# Altium PCB Pulser Driver.PcbDoc (part 3 of 3)
Units mil, origin at the board's own origin, x right, y up, seen from the top; angles counter-clockwise.
Board outline 1200 x 10020 mil, 6 copper layers (TopLayer, Ground, MidLayer1, MidLayer2, Power, BottomLayer); 260 components, 152 nets, 836 pads, 245 vias.
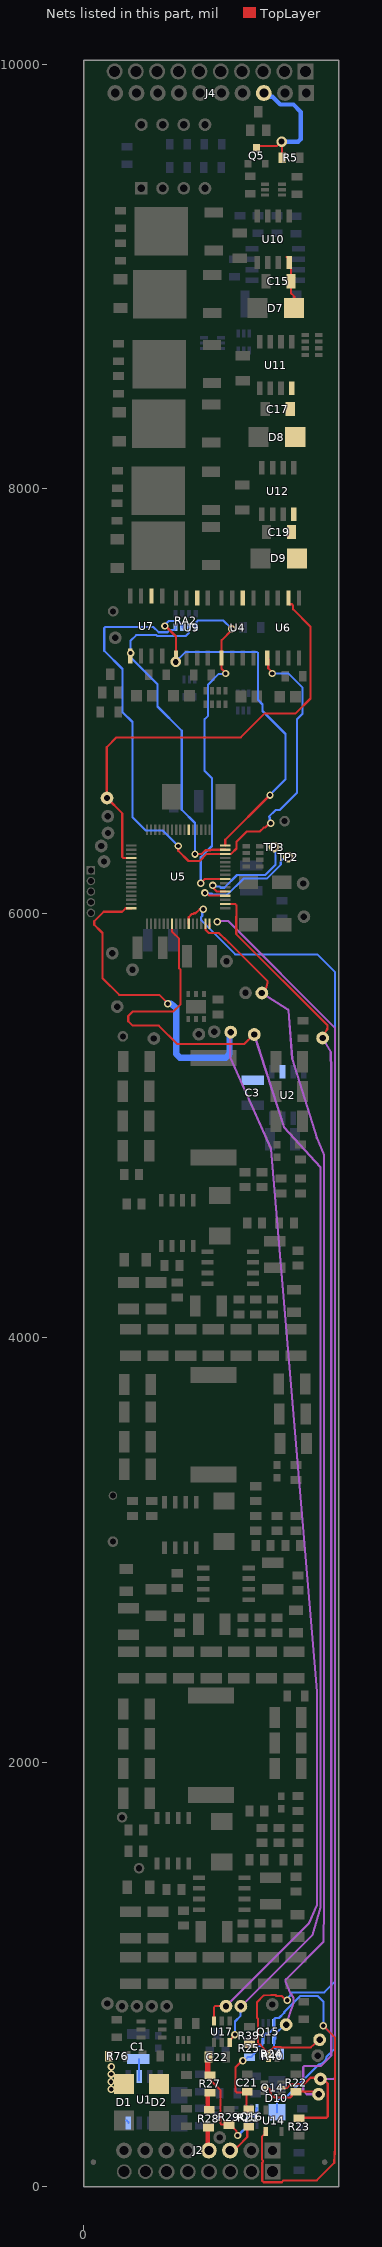
[diagram p7: the nets of this part, all layers, seen from the top]

## Via types
v1: diameter 35, hole 20, TopLayer to BottomLayer, 210 vias
v2: diameter 50, hole 28, TopLayer to BottomLayer, 35 vias

## Nets (pads, with @x,y where several pads share a name; then routed paths per layer and width w, separated by ;. In a path a pad name is that pad's centre, name@x,y a point inside that pad or via, vN(x,y) a via of type N, cw(c..) or ccw(c..) an arc to the next point about the centre after c; other vN are vias at no path point) (continued)
PP: C22.1 Q16.3 Q16.6 R27.1 R29.1 | length 624
  TopLayer w10: C22.1@583.33,603.33 587.32,607.32 C22.1@587.32,610 ; R27.1@592,523 598.86,516.14 598.86,498.14 624.96,472.04 625.56,472.04 632.59,465.01 632.59,464.41 643,454 643,297.86 648.86,292 R29.1@681,292 ; R29.1@685,291 691.75,291 706,276.75 706,275 719.75,261.25 719.75,245.34 v1(724.53,240.56)
  TopLayer w25: R27.1@583.33,537.45 C22.1@583.33,603.33
  BottomLayer w10: v1(724.53,240.56) 732.43,240.56 738.28,246.42 738.28,252.34 764.41,278.47 Q16.3@764.41,289.29 764.41,322.41 772.29,330.29 806.86,330.29 812.72,336.15 812.72,367.13 Q16.6@815.59,370
PP2: R27.2 R28.1 | length 80
  TopLayer w20: R28.1@583.33,370 R27.2@583.33,450
PULSE: J2.4 R28.2 | length 120.1
  TopLayer w10: J2.4@583.33,176.67 J2.4@590,170
  TopLayer w20: J2.4@583.33,176.67 R28.2@583.33,287.32
Q: J2.3 R21.2 | length 160.3
  TopLayer w10: J2.3@690,170 706.59,170 724.85,188.26 724.98,188.26 770,233.28 R21.2@770,287.32
Q-EN#: pad.44 Q14.5 R22.2 U5.34 | length 6319.9
  TopLayer w10: U5.34@666.38,6043.58 666.69,6043.27 713.14,6043.27 719,6037.41 719,5984.21 718.24,5983.45 718.24,5901.76 1147.95,5472.05 1147.95,5467.53 1146.87,5453.04 1143.98,5450.15 1143.7,5449.91 pad.44@1125,5412 ; Q14.5@850,465.59 852.87,462.72 870.83,462.72 880.7,452.84 880.7,435.3 895.87,420.13 973.55,420.13 979.41,425.98 979.41,434.61 992.13,447.32 R22.2@1000,447.32 1084.42,447.32 pad.44@1106,435
  MidLayer1 w10: pad.44@1106,435 1050,435 1034,451 1034,563.14 1039.86,569 1118,569 1166,617 1166,5254.32 1166,5254.6 1163.47,5346.84 pad.44@1125,5412
Q-RX: pad.40 Q15.4 R24.1 U5.31 | length 5702.3
  TopLayer w10: U5.31@572.8,5950 573.11,5949.69 573.11,5922.4 585.79,5909.72 588.71,5906.8 631.87,5906.8 635.71,5906.8 682.17,5862.83 682.27,5862.73 866.16,5678.84 866.16,5673.47 865.86,5672.27 856.69,5635.73 854.73,5633.77 853.86,5632.9 852.8,5632.27 pad.40@839,5624 ; pad.40@951,759 pad.40@952,758
  MidLayer1 w10: pad.40@839,5624 961.44,5546.75 961.72,5546.5 964.61,5543.61 982,5312.65 982.34,5311.57 1097.56,4941.73 1128.61,4867.57 1132,4863.12 1132,1309.97 1132,1309.78 1129.07,1161.31 1129.07,1153.07 952.99,976.99 950.87,974.87 950.87,967.34 950.87,966.59 971.31,915.22 987.5,890.22 987.5,865.78 pad.40@953,763
  BottomLayer w10: 895.59,671.16 Q15.4@895.59,690 ; Q15.4@895.59,695.59 901.93,695.59 Q15.4@903.23,696.89 ; 903.17,650 896,657.17 896,695.59 902.14,701.73 902.14,719.14 946,763 pad.40@953,763
Q-TX: pad.39 Q14.2 R23.1 U5.32 | length 6336
  TopLayer w10: U5.32@592.48,5939 U5.32@592.48,5950 ; Q14.2@930.71,465.59 957.99,465.59 975.68,483.28 1038.28,483.28 1068,513 1109,513 pad.39@1115,507 1127.64,507 1149,485.64 1149,329.86 1143.14,324 R23.1@1014,324
  MidLayer1 w10: v1(629,5960) 632.38,5963.38 679.62,5963.38 1183,5460 1183,511.27 1178.53,506.8 pad.39@1115,507
QP: C21.2 D10.2 Q15.3 Q15.6 R21.1 R25.1 U14.4 | length 2840.3
  TopLayer w10: v1(749.41,592.5) 745.5,592.5 714.5,561.5 714.5,448.83 720.36,442.97 765.65,442.97 C21.2@770,447.32 ; C21.2@765.7,446.06 765.7,374.3 R21.1@770,370 ; U14.4@852.6,260.59 852.6,249 840,236.4 840,212.97 839.5,212.47 839.5,127.53 843.39,123.64 843.39,115.36 840.5,112.47 840.5,27.53 847.53,20.5 932.47,20.5 940.97,29 1097.64,29 1180.07,111.43 1182.99,186.59 1183,186.88 1183,187.07 1183,703 v1(1128,758)
  BottomLayer w10: v1(749.41,592.5) 754.63,592.5 772.13,610 787.87,610 800.59,622.72 800.59,624.59 813.28,637.28 813.28,655.56 820.31,662.59 835.68,662.59 841.54,668.45 841.54,687.13 Q15.6@844.41,690 844.41,709 856.41,721 870,721 895.59,746.59 Q15.3@895.59,770.71 895.59,787.59 902,794 919.4,794 944,818.6 944,822.28 1019.72,898 1102,898 1130,870 1130,760 v1(1128,758) 1182,704 1182,650 1143.66,611.66 cw(c1102,617) 1107.34,575.34 950.38,418.38 928.38,418.38 910,400 D10.2@910,350
REF-3V0: C3.2 pad.37 U2.6 U5.16 U17.6 | length 6414.1
  TopLayer w10: U5.16@223.31,6023.9 197,6023.9 180.1,6007 93,6007 49,5963 49,5945.78 78.41,5916.38 78.59,5916.38 88,5906.97 88,5693.74 166.52,5615.23 355.77,5615.23 395.18,5575.82 v1(395.18,5573.48) ; U17.6@612.6,779.41 612.6,844.14 618.46,850 pad.37@670,850
  MidLayer1 w10: pad.37@670,850 1061.07,1241.07 1097.13,1322.02 1098,1323.96 1098,2331.37 882.13,4888.97 881.98,4890.67 690,5318 690,5438 pad.37@692,5440
  BottomLayer w30: v1(395.18,5573.48) 396.55,5573.62 398.16,5573.8 410.35,5573.8 425.07,5561.96 435,5552.03 435,5336.57 443.79,5327.79 452.57,5319 668.69,5319 686.26,5336.57 686.26,5434.26 pad.37@692,5440
RS: C1.2 D1.1 D2.1 R76.1 U1.2 U1.8 | length 130.9
  TopLayer w10: v1(129,459) 137,459 D1.1@143,465
  BottomLayer w10: U1.8@202,311.14 210,303.14 U1.8@210,300 ; U1.2@260,501 C1.2@260,600.94
  other v1: 128,494 129,530 130,565
RTD: pad.41 R39.1 R40.1 U5.27 | length 6691.5
  TopLayer w10: U5.27@494.06,5950 494.06,5982.06 508.58,5996.58 515.78,5996.58 519.08,5999.88 526.15,5999.88 545.77,6019.5 v1(562.5,6019.5) ; R39.1@780,670 819,670 819,669 ; R40.1@869.69,614.65 R40.1@869.69,630.39 ; v1(958,878) 951.61,878 931.82,897.78 907.61,897.78 902.87,902.53 881.48,902.53 881.08,902.52 848.21,901.21 815.94,868.94 815.94,806.03 816,805.97 816,795.58 821,790.58 821,671 819,669 ; pad.41@1111,692 1070,657 1070,655 930,655 928,657 895.07,657 885.2,647.13 885.2,645.91 R40.1@869.69,630.39 ; 819,669 831.08,669 R40.1@869.69,630.39
  BottomLayer w10: v1(562.5,6019.5) 557.72,6014.72 557.72,5987.95 552.5,5982.74 552.5,5967.46 713.57,5806.39 1100.61,5806.39 1183,5724 1183,965 1133,915 981,915 973.93,907.93 973.93,900.69 958,884.76 v1(958,878)
RTD-EN: pad.32 U5.23 U17.3 | length 6349
  TopLayer w10: U5.23@415.32,5950 415.32,5913 449,5879.32 449,5741.19 456,5734.19 456,5572 421,5537 230.39,5537 209.22,5515.84 209.22,5491.4 230.09,5470.53 353.47,5470.53 440,5384 756.14,5384 776.14,5404 pad.32@803,5429 ; U17.3@687.4,680 697.4,701.4 v1(712,716)
  MidLayer1 w10: pad.32@740,850 742,850 1078.07,1186.07 1114.62,1315.58 1115,1318.3 1115,4798.42 1115,4802.28 943.43,4991.94 942.77,4993.99 pad.32@803,5429
  BottomLayer w10: v1(712,716) 712,778.04 738.96,805 738.96,848.96 pad.32@740,850
SCL: TP3.1 U5.37 | length 507.8
  TopLayer w10: v1(607.57,6131.43) 612.36,6126.64 612.36,6116.97 626.69,6102.64 U5.37@666.38,6102.64
  BottomLayer w10: v1(607.57,6131.43) 612.36,6126.64 638.93,6126.64 645.07,6120.5 661.77,6120.5 721.31,6180.04 855.04,6180.04 903,6228 903,6305 TP3.1@896,6312
SCLK2: pad.50@109,6543 U4.6 U5.4 U6.6 U7.6 U9.6 | length 2165.8
  TopLayer w10: pad.50@108,6545.86 108,6783 154,6829 739.72,6829 852.72,6942 998.18,6942 1068,7011.82 1068,7350 986,7432 986,7450.14 980.14,7456 969,7456 U6.6@967.65,7457.35 ; pad.50@109,6543 181,6471 181,6265.98 186.86,6260.12 U5.4@223.31,6260.12 ; U6.6@964,7457.35 U6.6@964,7486
SDA: TP2.1 U5.36 | length 581.2
  TopLayer w10: v1(570.29,6096) 577.06,6096 590.11,6082.95 U5.36@666.38,6082.95
  BottomLayer w10: v1(570.29,6096) 574.29,6092 602.79,6092 607.79,6087 676.35,6087 752.4,6163.04 862.09,6163.04 928,6228.96 928,6246 938.35,6256.35 955.35,6256.35 TP2.1@963,6264
SFLASH-CS1#: RA2.4 U5.47 U7.1 | length 1609.1
  TopLayer w10: U7.1@219,7219.5 U7.1@222.75,7223.25 ; v1(220,7226) U7.1@220,7227 ; v1(523.61,6278.71) 525.05,6280.15 556.11,6280.15 572.76,6296.8 597.26,6296.8 599.95,6299.49 U5.47@666.38,6299.49
  BottomLayer w10: RA2.4@495.5,7348 495.5,7321.5 481,7307 345.74,7307 342.24,7310.5 246.53,7310.5 220,7283.97 v1(220,7226) 222.98,7223.02 222.98,7203.02 347,7079 347,6974 461,6860 461,6488 523.61,6425.39 v1(523.61,6278.71)
SFLASH-CS2#: RA2.6 U5.48 U9.1 | length 1781.4
  TopLayer w10: v1(382,7353.5) 384.5,7353.5 434,7304 U9.1@434,7203 ; v2(433,7185) U9.1@436.81,7181.19 ; U5.48@666.38,6319.17 666.38,6346.38 v1(877,6557)
  BottomLayer w10: v1(382,7353.5) 382,7358.24 401.48,7377.72 447.33,7377.72 454.35,7370.69 454.35,7365.53 464.01,7355.87 RA2.6@464.01,7348 ; v2(433,7185) 480,7232 815.14,7232 821,7226.14 821,7005 842,6984 842,6953 950,6845 950,6631.79 877,6558.79 v1(877,6557)
SFLASH-CS3#: RA2.2 U4.1 U5.40 | length 1658.2
  TopLayer w10: v1(550.99,6141.23) 550.99,6142.22 570.2,6161.43 586.67,6161.43 587.26,6162.02 611.7,6162.02 612.03,6161.69 U5.40@666.38,6161.69 ; v1(668,7130) 668,7133.39 648.39,7153 648.39,7202.39 U4.1@649,7203 649,7287 697,7335 v1(697,7340)
  BottomLayer w10: RA2.2@527,7348 530.63,7351.63 530.63,7373.14 536.49,7379 658,7379 v1(697,7340) ; v1(550.99,6141.23) 550.78,6170.44 550.78,6178.73 550.78,6264.28 603.56,6317.06 603.56,6636.19 569.37,6670.38 569.37,6914.59 585.5,6930.72 585.5,7078.22 635.5,7128.22 666.22,7128.22 v1(668,7130)
SFLASH-CS4#: RA2.8 U5.46 U6.1 | length 3125.8
  TopLayer w10: v1(445,6317) 445,6294 493,6246 546,6246 579.8,6279.8 U5.46@666.38,6279.8 666.69,6280.12 693.98,6280.12 719.29,6305.43 719.29,6337.35 767.16,6385.22 829.22,6385.22 847.73,6403.73 853.65,6403.73 873.92,6424 v1(880.5,6424) ; U6.1@864,7203 869,7198 869,7153.76 887.86,7134.91 v1(887.86,7129.86)
  BottomLayer w10: RA2.8@432.51,7348 432.51,7340.13 427.67,7335.28 405.5,7335.28 394.22,7324 352.78,7324 327.78,7349 101.86,7349 96,7343.14 96,7237 182,7151 182,6948 229,6901 229,6453 291.72,6390.28 371.72,6390.28 v1(445,6317) ; v1(880.5,6424) 875.72,6428.78 875.72,6450.85 871.78,6454.78 903.14,6486.14 922.14,6486.14 1004.5,6568.5 1004.5,6914.92 1031,6941.42 1031,7063.04 965.04,7129 888.72,7129 v1(887.86,7129.86)
SFLASH-CS5#: U5.54
VB1: C15.2 D7.2 U10.8 | length 256
  TopLayer w10: U10.8@955,9093 976.11,9071.89 C15.2@976.11,8978 976.11,8922.12 991.23,8907 D7.2@991.23,8852
VB2: C17.2 D8.2 U11.8
VB3: C19.2 D9.2 U12.8
VHALL: J4.3 Q5.3 R5.1 | length 640.8
  TopLayer w10: Q5.3@814,9607.2 821.8,9615 909,9615 930,9636 v2(932,9636) 932,9612.5 934,9610.5 R5.1@934,9560
  BottomLayer w20: J4.3@848,9865 862.88,9865 880.61,9847.27 888.66,9847.27 925.43,9810.5 987.5,9810.5 1022,9776 1022,9647.72 1010.28,9636 v2(932,9636)
pads on no net: F1. J2.6 J3.1 J3.2 J3.3 J3.4 J3.5 J3.6 J3.7 J3.8 J5.1 J5.2 J5.3 J5.4 J5.5 J5.6 J5.7 J5.8 J5.9 J5.10 Q7.3 Q13.6 Q18.3 Q19.3 R20. R35. RA3.1 RA3.2 RA5.1 RA5.2 U1.5 U2.1 U2.3 U2.5 U2.7 U2.8 U5.3 U5.33 U5.35 U8.1 U8.4 U8.5 U8.6 U8.7 U16.2 U16.8 X1.1
copper on no net:
  other v1: 184,8755 122.02,8758.09 186,8796 128,8808 120.5,8871

## Polygon pours and split planes (outlines as drawn)
DC- on MidLayer2 "DC-_L04_P000" (solid, pour order 0): 1190,7577 229,7577 229,9358 230,9359 885,9359 886,9358 916,9388 916,9906 982,9906 984,9908 1180,9906 1180,9366 1200,9366
3V3GND on MidLayer2 "3V3GND_L04_P004" (solid, pour order 4): 4,5370 6,5372 1203,5372 1203,3891 7,3891 7,5367
12VGND on MidLayer2 "12VGND_L04_P002" (solid, pour order 2): 13,2347 1196,2347 1196,910 1099,910 13,910
5VGND on MidLayer2 "5VGND_L04_P003" (solid, pour order 3): 1201,3860 1201,2363 4,2363 4,3860
GND on Ground (split plane): 1179.9,20.1 20.1,20.1 20.1,9999.9 1179.9,9999.9
3V3_VDD on Power (split plane): 1179.9,20.1 20.1,20.1 20.1,9999.9 1179.9,9999.9

## Keep-outs
KeepOutLayer:
  the board outline again, w10

## Other copper
TopLayer:
  rectangle net 3V3_VDD: 510,744 591,859
  rectangle net 5V: 802,9730 908,9805
  rectangle net 12V: 691,7624 883,7717
  rectangle net 3V3_VDD: 164,4015 398,4101
  rectangle net 3V3_VDD: 41,2439 260,2550
  rectangle net 3V3: 518,683 623,716
  rectangle net 3V3: 325,730 341,787
  rectangle net 3V3: 326,730 349,750
  rectangle net 3V3: 250,768 336,787
  rectangle net 3V3: 219,760 280,879
  rectangle net 3V3_VDD: 656,1235 691,1315
  rectangle net 3V3_VDD: 165,1050 1051,1135
  rectangle net 3V3: 177,4604 221,4722
  rectangle net GND: 485,5660 619,5706
  rectangle net 12V: 180,1475 229,1606
  rectangle net RTD-EN: 677,660 724,729
  rectangle net 5V: 937,63 970,282
  rectangle net REF-3V0: 602,758 623,880
  rectangle net REF-3V0: 602,820 700,880
  rectangle net 3V3GND: 92,3893 153,5454
  rectangle net 5VGND: 130,3258 219,3832
  rectangle net 5V: 143,3141 256,3182
  rectangle net 5VGND: 85,3234 172,3276
  rectangle net 5VGND: 84,3088 132,3273
  rectangle net GND: 486,5693 572,5745
  rectangle net GND: 468,5606 501,5850
  rectangle net GND: 347,5742 393,5892
  rectangle net GND: 130,733 181,805
  rectangle net GND: 61,730 292,747
  rectangle net 3V3: 108,7395 245,7450
  rectangle net CANL: 253,133 327,356
  rectangle net CANH: 152,132 225,361
  rectangle net LTC: 897,579 1105,641
  rectangle net RTD: 856,587 882,687
  rectangle net RTD: 755,651 883,687
  rectangle net NetR39_2: 681,760 804,801
  rectangle net BAT-M: 356,590 446,643
  rectangle net NetQ19_6: 430,671 447,795
  rectangle net 5VGND: 159,2370 1100,2420
  rectangle net 3V3GND: 1007,5317 1060,5428
  rectangle net 5VGND: 940,2287 975,2418
  rectangle net GND: 1002,667 1061,807
  rectangle net 12VGND: 1006,854 1060,980
  rectangle net GND: 184,589 293,663
  rectangle net RS: 102,442 402,531
  rectangle net RS: 99,437 170,642
  rectangle net GND: 907,6109 1062,6166
  rectangle net VHALL: 907,9535 958,9661
  rectangle net 12V: 713,8441 851,8552
  rectangle net 5VGND: 630,2562 690,3050
  rectangle net GND: 637,583 687,636
  rectangle net NetC61_2: 370,3149 724,3385
  rectangle net NetR59_2: 970,3160 1030,3350
  rectangle net 5VGND: 1050,2370 1100,3840
  rectangle net 3V3_VDD: 500,4020 608,4270
  rectangle net 3V3GND: 1060,3900 1140,4780
  rectangle net 12VOutPSU: 268,1558 296,2303
  rectangle: 105,8741 203,8872
  rectangle net 3V3_VDD: 91,8124 197,8261
  rectangle net 1: 687,9560 736,9824
  rectangle net 1: 709,9739 786,9898
  rectangle net 3: 12,8059 42,9820
  rectangle net 3: 12,9788 285,9820
  rectangle net 3: 207,9790 283,9912
  rectangle net 2: 51,8667 96,9777
  rectangle net 2: 51,9753 485,9780
  rectangle net 2: 408,9764 484,9894
  rectangle net 1: 706,9822 783,9897
  rectangle net 1: 707,9560 753,9898
  rectangle net 1: 123,9551 747,9598
  region net DC-: 852,9358 852,9255 884,9255 884,9358
  rectangle net 1: 121,9292 160,9594
  rectangle net PHASE-1: 147,9141 195,9246
  rectangle net 1: 150,9292 292,9326
  rectangle net PHASE-1: 148,9141 195,9174
  rectangle net NetF1_1: 138,8960 304,9010
  rectangle net 3: 14,8060 477,8105
  rectangle net 3V3_VDD: 77,7566 183,7703
  rectangle net NetF3_1: 124,7741 327,7789
  rectangle net 3V3: 309,7066 336,7424
  rectangle net 3V3: 221,7065 342,7152
  rectangle net 3V3: 224,7000 280,7149
  rectangle net GND: 571,7319 658,7360
  rectangle net GND: 572,7096 619,7359
  rectangle net GND: 364,7090 481,7139
  rectangle net 3V3: 750,5952 803,6098
  rectangle net PGC: 253,5935 303,5970
  rectangle net 3V3: 231,5739 299,5891
  rectangle net Q-TX: 587,5926 633,5975
  rectangle net VHALL: 799,9590 957,9625
  rectangle net 2: 59,8667 481,8722
  rectangle net 3V3: 140,6940 282,7065
  rectangle net GND: 671,342 700,636
  rectangle net 5VGND: 440,2564 688,2591
  rectangle net 3V3_VDD: 31,1041 76,5902
  rectangle net SCLK2: 522,7452 546,7551
  rectangle net SCLK2: 307,7454 331,7550
  rectangle net SCLK2: 737,7452 761,7551
  rectangle net MISO2: 897,7169 933,7293
  rectangle net MISO2: 671,7168 708,7291
  rectangle net MISO2: 468,7168 501,7293
  rectangle net MISO2: 250,7169 284,7290
  rectangle net 3V3: 955,7091 968,7424
  rectangle net GND: 990,7091 1040,7302
  rectangle net 3V3: 740,7166 759,7421
  rectangle net GND: 789,7162 809,7239
  rectangle net 3V3: 512,7097 544,7421
  rectangle net GND: 358,7092 378,7240
  rectangle net 3V3: 309,7092 328,7425
  rectangle net 3V3: 210,7396 277,7527
  rectangle net SCLK2: 951,7450 975,7551
  rectangle net 3V3: 424,7406 494,7523
  rectangle net 3V3: 639,7406 708,7522
  rectangle net 3V3: 854,7406 923,7522
  rectangle net 3V3: 207,7404 968,7424
  rectangle net SCLK2: 308,7542 976,7551
  region net HA: 562,8848 562,8757 649,8757 649,8848
  region net 2: 557,8428 557,8370 688,8370 688,8428
  region net 2: 655,8594 655,8371 688,8371 688,8594
  region net 2: 656,8596 656,8571 886,8571 886,8596
  region net 1: 562,9035 562,8986 688,8986 688,9035
  region net 1: 663,9169 663,8986 689,8986 689,9169
  region net 1: 663,9169 663,9136 882,9136 882,9169
  region net 1: 838,9170 838,8945 881,8945 881,9170
  region net DC-: 572,9325 572,9197 657,9197 657,9325
  region net DC-: 572,9236 572,9184 769,9184 769,9236
  region net LA: 534,9147 534,9099 653,9099 653,9147
  region net LA: 511,9360 511,9100 545,9100 545,9360
  region net LA: 511,9360 511,9336 827,9336 827,9360
  region net LA: 803,9360 803,9257 827,9257 827,9360
  region net 12V: 702,9108 702,8804 829,8804 829,9108
  region net HA: 564,8787 564,8756 921,8756 921,8787
  region net HA: 904,9087 904,8757 931,8757 931,9087
  region net VB1: 955,9093 955,8891 1030,8891 1030,9093
  region net HB: 541,8184 541,8152 939,8152 939,8184
  region net VB2: 952,8504 952,8197 1044,8197 1044,8504
  region net HB: 540,8243 540,8153 703,8153 703,8243
  region net 12V: 713,8505 713,8441 845,8441 845,8505
  region net 2: 866,8596 866,8344 892,8344 892,8596
  region net PHASE-2: 138,8620 138,8511 191,8511 191,8620
  region net LB: 520,8562 520,8474 631,8474 631,8562
  region net DC-: 545,8703 545,8570 632,8570 632,8703
  region net LB: 521,8734 521,8714 841,8714 841,8734
  region net DC-: 547,8649 547,8606 890,8606 890,8649
  region net DC-: 865,8722 865,8620 891,8620 891,8722
  region net LB: 521,8734 521,8497 538,8497 538,8734
  region net HB: 916,8505 916,8151 939,8151 939,8505
  region net 12V: 713,8545 713,8196 784,8196 784,8545
  region net 12V: 715,7719 715,7626 880,7626 880,7719
  region net 12V: 713,7918 713,7626 785,7626 785,7918
  region net VB3: 961,7911 961,7625 1052,7625 1052,7911
  region net 3: 875,7910 875,7764 902,7764 902,7910
  region net DC-: 877,8130 877,8023 901,8023 901,8130
  region net LC: 507,7963 507,7899 645,7899 645,7963
  region net 3: 608,7846 608,7798 686,7798 686,7846
  region net 12V: 713,7910 713,7850 852,7850 852,7910
  region net HC: 556,7666 556,7582 647,7582 647,7666
  region net HC: 557,7616 557,7581 950,7581 950,7616
  region net 3: 665,7983 665,7935 908,7935 908,7983
  region net PHASE-3: 130,8018 130,7920 183,7920 183,8018
  region net HC: 925,7909 925,7581 950,7581 950,7909
  region net 3: 652,7983 652,7798 702,7798 702,7983
  region net 3: 864,7983 864,7765 909,7765 909,7983
  region net DC-: 558,8110 558,7998 644,7998 644,8110
  region net LC: 507,8136 507,7925 540,7925 540,8136
  region net LC: 507,8140 507,8118 852,8118 852,8140
  region net DC-: 557,8042 557,7997 901,7997 901,8042
  region net LC: 824,8137 824,8068 851,8068 851,8137
  rectangle net 3V3GND: 1060,4710 1135,5343
  rectangle net 3V3GND: 1010,4970 1120,5350
  rectangle net NetR49_2: 990,4730 1050,4860
  rectangle net NetC47_2: 900,4730 950,4870
  rectangle net 3V3OutPSU: 880,4890 1040,4930
  rectangle net 3V3GND: 98,4740 215,5455
  rectangle net 3V3OutPSU: 880,4890 928,5360
  rectangle net 3V3OutPSU: 240,4604 340,5360
  rectangle net 3V3OutPSU: 290,5290 930,5360
  rectangle net 3V3GND: 553,4395 691,4521
  rectangle net 3V3GND: 750,4629 870,4670
  rectangle net 3V3GND: 815,4630 865,4730
  rectangle net 3V3GND: 750,4495 790,4669
  rectangle net NetC39_1: 730,4760 870,4810
  rectangle net NetC39_2: 670,4690 790,4730
  rectangle net 3V3FB: 900,4590 1050,4700
  rectangle net NetC39_2: 356,4618 720,4879
  rectangle net 3V3GND: 93,4492 788,4576
  rectangle net 3V3FB: 820,4410 940,4610
  rectangle net NetC38_2: 860,4181 1030,4251
  rectangle net NetC40_2: 770,4330 950,4370
  rectangle net 3V3FB: 769,4394 948,4480
  rectangle net NetC40_2: 850,4306 1036,4371
  rectangle net NetC40_1: 970,4390 1040,4570
  rectangle net 3V3RC: 710,4161 823,4264
  rectangle net 3V3ISNS: 625,4101 675,4321
  rectangle net 3V3ISNS: 430,4300 675,4330
  rectangle net NetQ20_1: 270,4310 400,4460
  rectangle net NetQ20_1: 350,4400 480,4460
  rectangle net 3V3GND: 89,4109 466,4211
  rectangle net 3V3GND: 88,3890 180,3940
  rectangle net 3V3GND: 960,3890 1140,3940
  rectangle net 3V3GND: 960,4090 1120,4140
  rectangle net 12V: 190,1475 285,1525
  rectangle net 5VGND: 84,3235 174,3831
  rectangle net NetC69_2: 890,3170 930,3360
  rectangle net 5VOutPSU: 880,3380 940,3850
  rectangle net 5VGND: 1010,3450 1060,3840
  rectangle net 5VOutPSU: 290,3210 340,3850
  rectangle net 5VOutPSU: 203,3210 346,3250
  rectangle net 5VGND: 294,3088 346,3179
  rectangle net 5VOutPSU: 290,3800 940,3850
  rectangle net NetC61_1: 784,3140 835,3250
  rectangle net NetC61_2: 710,3280 840,3384
  rectangle net 5VOutPSU: 900,3380 1040,3420
  rectangle net 3V3_VDD: 360,4240 610,4270
  rectangle net 3V3_VDD: 167,4233 239,4411
  rectangle net 3V3_VDD: 179,4236 480,4285
  rectangle net 3V3GND: 790,4090 1020,4140
  rectangle net 3V3_VDD: 700,4030 760,4130
  rectangle net 3V3GND: 180,3890 1040,3940
  rectangle net NetC62_2: 840,2790 950,2880
  rectangle net NetC62_2: 750,2860 950,2880
  rectangle net 5vFB: 750,2910 950,2970
  rectangle net 5VGND: 608,3000 840,3130
  rectangle net 5VGND: 630,3010 830,3050
  rectangle net 5vFB: 860,3070 1030,3110
  rectangle net 5vFB: 860,2910 950,3110
  rectangle net NetC62_1: 1000,2860 1040,3030
  rectangle net 5VGND: 970,2560 1030,2650
  rectangle net 5VGND: 160,2580 220,2690
  rectangle net 5VGND: 160,2570 470,2640
  rectangle net 5VGND: 680,2637 1030,2653
  rectangle net 5VISNS: 290,2800 590,2830
  rectangle net NetQ21_1: 170,2890 440,2930
  rectangle net 5VGDRV: 500,2980 540,3040
  rectangle net 5VGDRV: 500,2870 520,3040
  rectangle net 5VGDRV: 500,2850 590,2880
  rectangle net 5VGND: 530,2900 660,2930
  rectangle net 5VRC: 720,2660 810,2770
  rectangle net NetC62_2: 840,2790 1040,2840
  rectangle net NetC60_2: 880,2660 1040,2730
  rectangle net 5VGND: 804,2587 1098,2652
  rectangle net GND: 923,669 1020,719
  rectangle net 3V3_VDD: 720,2500 780,2630
  rectangle net 3V3_VDD: 290,2660 600,2750
  rectangle net 3V3_VDD: 510,2600 600,2780
  rectangle net 3V3_VDD: 240,2700 600,2770
  rectangle net 3V3_VDD: 51,2700 260,2870
  rectangle net NetQ21_1: 430,2870 470,3040
  rectangle net NetQ21_1: 370,2980 490,3040
  rectangle net 5VGND: 87,3088 839,3130
  rectangle net 5V: 220,3000 320,3080
  rectangle net 12VISNS: 440,1350 480,1430
  rectangle net 12VISNS: 300,1280 400,1360
  rectangle net 12VISNS: 300,1340 570,1360
  rectangle net 12VGND: 1060,1640 1110,1940
  rectangle net 12VGND: 1000,1920 1110,2260
  rectangle net NetC83_1: 820,1670 870,1790
  rectangle net 12VGND: 750,1600 860,1640
  rectangle net 12VGND: 530,1510 800,1660
  rectangle net NetC84_1: 990,1440 1030,1570
  rectangle net 12VGND: 100,928 150,2300
  rectangle net 12VGND: 170,1150 270,1230
  rectangle net 12VGND: 1060,930 1110,1730
  rectangle net 12VGND: 102,930 190,981
  rectangle net 12VGND: 99,1210 621,1260
  rectangle net 12VGND: 580,1150 620,1470
  rectangle net NetQ22_1: 340,1390 410,1550
  rectangle net NetQ22_1: 340,1480 460,1550
  rectangle net NetQ22_1: 290,1380 410,1450
  rectangle net 12VGND: 530,1450 700,1570
  rectangle net 12VOutPSU: 870,1820 930,2350
  rectangle net 12VOutPSU: 270,2290 920,2350
  rectangle net 3V3_VDD: 159,1270 277,1443
  rectangle net 12VGND: 440,1150 620,1250
  rectangle net 3V3_VDD: 440,1280 570,1320
  rectangle net NetC82_2: 810,1280 1038,1298
  rectangle net NetC82_2: 800,1280 820,1360
  rectangle net NetC82_2: 770,1340 820,1370
  rectangle net NetC84_2: 830,1310 930,1390
  rectangle net NetC82_2: 880,1230 1038,1295
  rectangle net NetC84_2: 730,1380 1030,1420
  rectangle net 12VRC: 720,1220 860,1270
  rectangle net 12VRC: 730,1220 780,1310
  rectangle net 12VGND: 806,1151 1107,1199
  rectangle net 3V3_VDD: 650,1051 780,1190
  rectangle net 12VFB: 730,1440 900,1470
  rectangle net 12VFB: 830,1430 930,1570
  rectangle net 12VFB: 900,1510 960,1640
  rectangle net 12VFB: 830,1510 960,1570
  rectangle net NetC83_2: 490,1700 710,1840
  rectangle net NetC83_2: 346,1700 796,1867
  rectangle net NetC91_2: 910,1670 950,1800
  rectangle net 12VFB: 900,1600 1030,1640
  rectangle net NetR69_2: 980,1670 1030,1790
  rectangle net 12VOutPSU: 870,1820 1030,1860
  rectangle net 12VOutPSU: 290,1790 330,2300
  rectangle net 12VGND: 140,1650 210,2300
  rectangle net 3V3_VDD: 169,4016 1049,4066
  rectangle net 3V3_VDD: 32,2490 1040,2550
  rectangle net 3V3_VDD: 310,1060 400,1190
  rectangle net 12VGND: 170,930 1090,980
  rectangle net 3V3_VDD: 170,1050 1050,1110
MidLayer1:
  rectangle net 3V3: 705,9190 757,9351
  rectangle net 3V3: 704,9189 1110,9234
  rectangle net 3V3: 211,7393 284,8655
  rectangle net 3V3: 110,7395 292,7449
  rectangle net 3V3: 1063,8955 1110,9233
  rectangle net 3V3: 173,9314 757,9354
  rectangle net 3V3: 231,8598 350,8655
  rectangle net 3V3: 283,8598 351,9267
  rectangle net 3V3: 172,9215 336,9266
  rectangle net 3V3: 172,9215 228,9462
MidLayer2:
  rectangle net 5V: 848,9726 899,9799
  rectangle net 12V: 492,8300 536,8441
  rectangle net 12V: 492,8391 757,8441
  rectangle net 5V: 86,1166 350,1217
  rectangle net 5V: 284,405 344,691
  rectangle net 5V: 14,636 344,692
  rectangle net 5V: 12,636 52,977
  rectangle net 5V: 16,909 140,977
  rectangle net 5V: 89,909 141,1211
  rectangle net 3V3: 647,673 682,776
  rectangle net 3V3: 647,746 880,776
  rectangle net 3V3: 847,536 882,776
  rectangle net 3V3: 448,672 682,708
  rectangle net 3V3: 221,759 279,1038
  rectangle net 5V: 138,3014 188,3188
  rectangle net 5V: 185,3013 260,3317
  rectangle net 5V: 516,618 660,654
  rectangle net 5V: 624,404 659,654
  rectangle net 5V: 938,60 971,437
  rectangle net 5V: 284,383 972,438
  rectangle net 3V3: 205,6848 273,7052
  rectangle net 3V3: 205,6034 243,7052
  rectangle net 3V3: 14,6032 244,6072
  rectangle net 5V: 20,9607 240,9649
  rectangle net 5V: 335,9678 509,9800
  rectangle net 5V: 20,9753 899,9799
  rectangle net 5V: 20,7356 54,9798
  rectangle net 5V: 20,7350 339,7381
  rectangle net 5V: 311,4886 342,7382
  rectangle net 5V: 309,4816 857,4934
  rectangle net 5V: 420,3260 467,4936
  rectangle net 5V: 203,3259 467,3317
  rectangle net 5V: 111,3013 346,3063
  rectangle net 5V: 297,1167 347,3063
BottomLayer:
  rectangle net GND: 375,5767 444,5925
  rectangle net GND: 1002,670 1063,769
  rectangle net 12V: 714,7810 786,7919
  rectangle net 12V: 688,7623 786,7743
  rectangle net 12V: 802,8901 847,8939
  rectangle net 12V: 720,8392 848,8431
  rectangle net 3V3_VDD: 31,2436 242,2869
  rectangle net 3V3: 439,673 497,1034
  rectangle net 3V3: 442,672 599,724
  rectangle net 3V3: 344,696 603,725
  rectangle net 3V3: 194,695 375,805
  rectangle net 12V: 177,1475 317,1527
  rectangle net GND: 679,7017 734,7055
  rectangle net GND: 679,6893 710,7056
  rectangle net 3V3: 221,984 494,1038
  rectangle net 3V3: 303,985 356,1388
  rectangle net 3V3: 304,1338 636,1391
  rectangle net 3V3: 598,1339 634,4724
  rectangle net 3V3: 179,4682 636,4725
  rectangle net 5V: 623,414 658,515
  rectangle net 3V3: 787,503 861,537
  rectangle net 3V3: 829,530 881,636
  rectangle net GND: 626,9488 667,9649
  rectangle net GND: 176,9483 283,9546
  rectangle net 12V: 820,8392 847,8939
  rectangle net 12V: 493,7862 818,7904
  rectangle net 12V: 493,7863 532,8399
  rectangle net RS: 103,342 375,478
  rectangle net RS: 249,347 272,624
  rectangle net RS: 100,268 222,330
  rectangle net RS: 102,270 159,643
  rectangle net 5V: 939,86 969,237
  rectangle net 5V: 940,61 1030,124
  rectangle net 5V: 939,204 1028,234
  rectangle net 5V: 1004,203 1055,302
  rectangle net 5V: 517,602 613,661
  rectangle net DC-: 1128,8811 1171,9303
  rectangle net DC-: 983,8809 1153,8932
  rectangle net DC-: 973,9266 1167,9304
  rectangle net 3V3: 758,5951 958,6001
  rectangle net GND: 903,6043 959,6175
  rectangle net 3V3: 205,7396 781,7449
  rectangle net GND: 748,5079 994,5168
  rectangle net GND: 748,4882 902,5167
  rectangle net REF-3V0: 735,5193 846,5324
  rectangle net REF-3V0: 453,5303 949,5328
  rectangle net REF-3V0: 920,5228 950,5328
  rectangle net GND: 846,4883 898,5051
  rectangle net 5V: 975,4821 1008,5064
  rectangle net 3V3: 234,698 272,865
  rectangle net 3V3_VDD: 438,1052 644,1110
  rectangle net 3V3_VDD: 510,744 546,1109
  rectangle net 3V3: 1074,8964 1102,9259
  rectangle net 3V3: 904,9247 1101,9258
  rectangle net 3V3: 732,7320 781,7434
  rectangle net 3V3: 711,9533 747,9590
  rectangle net 3V3: 711,9491 933,9578
  rectangle net 3V3: 906,9248 935,9554
  rectangle net 3V3: 981,8957 1117,9003
  rectangle net 3V3: 13,6035 109,6066
  rectangle net 5V: 732,4822 1006,4870
  rectangle net GND: 350,9488 421,9649
  rectangle net 12V: 904,5580 1152,5637
  rectangle net 12V: 902,5484 966,5636
  rectangle net 12V: 519,5485 966,5544
  rectangle net 12V: 350,2928 429,4580
  rectangle net 12V: 254,2893 429,2966
  rectangle net 12V: 252,1477 317,2963
  rectangle net GND: 709,9177 788,9260
  rectangle net GND: 781,9271 837,9389
  rectangle net GND: 688,9367 843,9403
  rectangle net IG: 664,9270 757,9310
  rectangle net IG: 665,9144 692,9307
  rectangle net IG: 678,9033 734,9168
  rectangle net IG: 680,9033 823,9051
  rectangle net GND: 412,333 556,376
  rectangle net GND: 524,353 573,502
  rectangle net 3V3_VDD: 31,3956 326,4410
  rectangle net 3V3_VDD: 29,1058 272,1444
  rectangle net 3V3_VDD: 173,1057 274,1432
  rectangle net 3V3_VDD: 650,1150 701,1323
  rectangle net 3V3_VDD: 445,1280 697,1318
  rectangle net GND: 622,8813 780,8927
  rectangle net MISO2: 248,7252 935,7295
  rectangle net GND: 930,670 1020,710
  rectangle net Q-RX: 890,590 916.34,710
Power (plane layer: these items are gaps in the copper):
  lines w10: 0,4120 0,3 1205,3 ; 1205,2 1205,4120
Ground (plane layer: these items are gaps in the copper):
  lines w10: -8,-6 10,12 10,4120 ; -3,10 1177,10 ; 1190,12 1190,3972

## Silkscreen, mask and mechanical layers (free items; w line width, h text height)
TopOverlay:
  lines w10: 0,2350 1197,2350 ; 0,5370 1196,5370 ; 2,668 252,668 ; 2,669 2,814 ; 2,813 975,813 987,801 987,737 988,736 989,735 1065,735 1142,812 1175,812 1193,812 1193,576 858,576 ; 5,3870 1198,3870 ; 255,666 255,578 259,574 526,574 ; 326,1480 326,1481 ; 333,4441 333,4442 ; 359,2964 359,2965 ; 527,575 527,605 544,622 544,648 575,679 575,809 571,813 ; 555,663 558,660 710,660 771,599 832,599 852,579 ; 797,1304 797,1305
  text "PHASE-3" at 101,7332 h10
  text "SFLASH_CS2n" at 406.33,7169 h10 r90
  text "SFLASH_CS3n" at 637.33,7165 h10 r90
  text "SFLASH_CS1n" at 198.33,7146 h10 r90
  text "SFLASH_CS4n" at 844.33,7145 h10 r90
  text "SCLK2" at 82,6578 h10
  text "MOSI2" at 92,6490 h10
  text "MISO2" at 94,6410 h10
  text "PHASE-1" at 115,6326 h10
  text "PHASE-2" at 102,6276 h10
  text "MCLRn" at 75,6180 h10 r90
  text "GND" at 1022,6176 h10
  text "PGD" at 73,6137 h10 r90
  text "PGC" at 74,6088 h10 r90
  text "3V3" at 73,6036 h10 r90
  text "CLOCK" at 1015,6019 h10
  text "Programming Interface" at 2.67,6004 h10 r90
  text "GND" at 74,5986 h10 r90
  text "Rev. 4.3 (Proto1)" at 1180,5933 h30 r90
  text "LTC" at 665,5815 h10
  text "MEAS-EN" at 121,5749 h10
  text "1024-Bit, 1-Wire EEPROM" at 464,5669 h20
  text "1-WIRE" at 738,5665 h10
  text "Q-RX" at 826,5663 h10
  text "12V" at 1090,5645 h10
  text "3V3" at 159,5591 h20
  text "3V3GND-TIE" at 984,5539 h12
  text "Q-EN#" at 1129,5487 h10
  text "F" at 611,5474 h10
  text "REF-3V0" at 677,5474 h10
  text "RTD-EN" at 776,5471 h10
  text "HV" at 536,5464 h10
  text "5V" at 322,5442 h10
  text "F" at 612,5442 h10
  text "3V3 Section" at 1163,4820 h20 r270
  text "C27-31" at 1082,4045 h20
  text "5V Section" at 1150,3359 h20 r270
  text "C48-54" at 1064,2463 h20
  text "5VGND-TIE" at 1081,2291 h12
  text "12V Section" at 1154,1790 h20 r270
  text "C71-78" at 1072,1088 h20
  text "12VGND-TIE" at 1083,885 h12
  text "MEAS-EN" at 62,882 h10
  text "CANTX" at 152,882 h10
  text "3V3" at 232,882 h10
  text "5V" at 309,882 h10
  text "BAT-M" at 375,882 h10
  text "CANRX" at 438,882 h10
  text "P" at 875,882 h10
  text "REF-3V0" at 634,881 h10
  text "RTD-EN" at 714,881 h10
  text "Resistance Temperature Detector" at 1142,808 h12 r270
  text "Q-RX" at 937,793 h10
  text "RTD" at 1081,724 h10
  text "Battery Voltage Measurement" at 89,674 h12 r90
  text "LTC" at 1091,648 h10
  text "PGND-TIE" at 10,631 h12
  text "Q-TX" at 1108,501 h10
  text "Q-EN#" at 1087,341 h10
BottomOverlay:
  text "Voltage Reference" at 1035,5306.33 h10
Mechanical1:
  lines w10: -1,1 -1,10030 1210,10030 1210,1 -1,1
Mechanical2:
  lines w10: -439.75,60.08 -420,0 ; -430,0.04 -410,-0.04 ; -400.76,4589.13 -420,0 ; -399.75,59.92 -420,0 ; -398.25,9960.08 -378,10020 ; -397.24,5430.87 -378,10020 ; -388,10020.04 -368,10019.96 ; -358.25,9959.92 -378,10020 ; -20,-260 -20,-240 ; 40,-270 -20,-250 ; 40,-230 -20,-250 ; 314.08,-250 -20,-250 ; 865.92,-250 1200,-250 ; 1140,-270 1200,-250 ; 1140,-230 1200,-250 ; 1200,-260 1200,-240
  text "10020.088 (mil)" at -364.73,4598.98 h60 r89.76
  text "1220 (mil)" at 324.08,-285.99 h60
Mechanical4:
  lines w8: 281,130 281,10500 ; 1184,134 1184,10514

## Dimensions
-20,25 to 45,25 on Mechanical2
-40,50 to -40,115 on Mechanical2
-35,4140 to -35,4075 on Mechanical2
-10,4160 to 55,4160 on Mechanical2
1220,50 to 1220,115 on Mechanical2
1200,25 to 1135,25 on Mechanical2

## Text inside footprints (layer, text, board x,y; h text height)
U16: TopOverlay "*" at 236,9403.5 h50 r90; Mechanical13 "*" at 296,9418.5 h50 r90